# EAGLE board Temp Sensor w_ button, LCD &amp;amp; LED (EAGLE 9.7.0)

Size 167.13 x 146.74 mm. Coordinates in mm from the lower left corner, seen from the top.
Outline: 0,0 167.13,0 167.13,146.74 0,146.74 0,0
Copper layers (1*16): Top 0.035mm / dielectric 1.5mm / Bottom 0.035mm
Design rules "default": minimum track width 6mil, minimum drill 0.35mm, track to track 6mil, track to pad 6mil, pad to pad 6mil, via to via 6mil, smd to smd 6mil, copper to edge 40mil, drill to drill 6mil, minimum pad ring 10mil, minimum via ring 8mil, stop-mask expansion 4mil, vias tented up to drill 0mil, thermal gap 10mil

## Footprints (pad centres in the part's own frame; a part is rotated, then mirrored left to right if it is on the bottom)
LEDRD254W60D565H860B = drill 0.981 pad 1.581: 1 -1.27,0; 2 1.27,0
LEDRD254W60D565H860B_Y = drill 0.981 pad 1.581: 1 -1.27,0; 2 1.27,0
LEDRD254W60D565H860B_G = drill 0.981 pad 1.581: 1 -1.27,0; 2 1.27,0
LEDRD254W60D565H860B_B = drill 0.981 pad 1.581: 1 -1.27,0; 2 1.27,0
LED-RGB-5MM = drill 0.9: B 0.635,0.635; C -0.635,-0.635; G 1.905,-0.635; R -1.905,0.635
RESAD1016W63L850D250B = drill 0.83 pad 1.43: 1 -5.08,0; 2 5.08,0
HA-06-SM065 = drill 1 pad 1.676: 1 -2.54,-2.54; 2 0,2.54; 3 2.54,-2.54
SWITCH-MOMENTARY-PTH-6.5MM = drill 1.016 pad 1.88: 1 -3.251,2.261; 2 3.251,2.261; 3 -3.251,-2.261; 4 3.251,-2.261
ARDUINO-UNO-R3-SHIELD = drill 1.016 pad 1.88: 3.3V 24.13,-2.54; 5V 24.13,0; A0 24.13,12.7; A1 24.13,15.24; A2 24.13,17.78; A3 24.13,20.32; A4 24.13,22.86; A5 24.13,25.4; AREF -24.13,-13.97; D2 -24.13,20.32; D3 -24.13,17.78; D4 -24.13,15.24; D5 -24.13,12.7; D6 -24.13,10.16; D7 -24.13,7.62; D8 -24.13,3.81; D9 -24.13,1.27; D10 -24.13,-1.27; D11 -24.13,-3.81; D12 -24.13,-6.35; D13 -24.13,-8.89; GND@0 24.13,2.54; GND@1 24.13,5.08; GND@2 -24.13,-11.43; IOREF 24.13,-7.62; NC 24.13,-10.16; RES 24.13,-5.08; RX -24.13,25.4; SCL -24.13,-19.05; SDA -24.13,-16.51; TX -24.13,22.86; VIN 24.13,7.62
TO92 = drill 0.813 octagon: 1 -1.27,0; 2 0,1.905; 3 1.27,0
JHD-162A = drill 1.016 long: 1 -19.05,0; 2 -16.51,0; 3 -13.97,0; 4 -11.43,0; 5 -8.89,0; 6 -6.35,0; 7 -3.81,0; 8 -1.27,0; 9 1.27,0; 10 3.81,0; 11 6.35,0; 12 8.89,0; 13 11.43,0; 14 13.97,0; 15 16.51,0; 16 19.05,0

## Placement (x,y rotation side)
D1  RED  [LEDRD254W60D565H860B]  156.51,39.38 0 top
D2  YELLOW  [LEDRD254W60D565H860B_Y]  148.89,39.38 0 top
D3  GREEN  [LEDRD254W60D565H860B_G]  141.27,39.38 0 top
D4  BLUE  [LEDRD254W60D565H860B_B]  133.65,39.38 0 top
D5  BLUE  [LEDRD254W60D565H860B_B]  133.65,36.84 0 top
D6  GREEN  [LEDRD254W60D565H860B_G]  141.27,36.84 0 top
D7  YELLOW  [LEDRD254W60D565H860B_Y]  148.89,36.84 0 top
D8  RED  [LEDRD254W60D565H860B]  156.51,36.84 0 top
D9  LED-RGBRCBG-PTH  [LED-RGB-5MM]  143.81,19.06 180 top
R1  1k  [RESAD1016W63L850D250B]  96.82,13.98 90 top
R2  200  [RESAD1016W63L850D250B]  142.54,49.54 90 top
R3  200  [RESAD1016W63L850D250B]  150.16,49.54 90 top
R4  200  [RESAD1016W63L850D250B]  157.78,49.54 90 top
R5  200  [RESAD1016W63L850D250B]  134.92,49.54 90 top
R6  220  [RESAD1016W63L850D250B]  128.02,120.13 90 top
R7  200  [RESAD1016W63L850D250B]  132.38,29.22 90 top
R8  200  [RESAD1016W63L850D250B]  140,29.22 90 top
R9  200  [RESAD1016W63L850D250B]  155.24,29.22 90 top
RPOT1  10k  [HA-06-SM065]  97.89,139.69 0 top
S1  SWITCH_MOMENTARY  [SWITCH-MOMENTARY-PTH-6.5MM]  94.28,30.49 90 top
U1  ARDUINO-UNO-R3-SHIELD  [ARDUINO-UNO-R3-SHIELD]  47.88,29.84 270 top
U2  TMP36GT9Z_TO92  [TO92]  104.44,26.68 0 top
U3  LCD-16X2JHD-162A  [JHD-162A]  111.51,115.17 0 top

## Library data of the parts
D1 D8 = Tinkercad; CATEGORY: Opto-Electronic; SUB-CATEGORY: LED; VALUE: LED_RED
D2 D7 = Tinkercad; CATEGORY: Opto-Electronic; SUB-CATEGORY: LED; VALUE: LED_YELLOW
D3 D6 = Tinkercad; CATEGORY: Opto-Electronic; SUB-CATEGORY: LED; VALUE: LED_GREEN
D4 D5 = Tinkercad; CATEGORY: Opto-Electronic; SUB-CATEGORY: LED; VALUE: LED_BLUE
D9 R1-R9 RPOT1 S1 U1-U3 = Tinkercad

## Nets
D1_C: D1.2 D8.2 R4.1
D2_C: D2.2 D7.2 R3.1
D3_C: D3.2 D6.2 R2.1
D4_C: D4.2 D5.2 R5.1
D9_B: D9.B R7.1
D9_G: D9.G R8.1
D9_R: D9.R R9.1
U1_5V: R6.2 RPOT1.3 S1.1 S1.2 U1.5V U2.3 U3.2
U1_A0: U1.A0 U2.2
U1_D2: R1.2 S1.3 S1.4 U1.D2
U1_D3: U1.D3 U3.14
U1_D4: U1.D4 U3.13
U1_D5: U1.D5 U3.12
U1_D6: U1.D6 U3.11
U1_D7: U1.D7 U3.4
U1_D8: U1.D8 U3.6
U1_D10: D4.1 D5.1 R7.2 U1.D10
U1_D11: D3.1 D6.1 R8.2 U1.D11
U1_D12: D2.1 D7.1 U1.D12
U1_D13: D1.1 D8.1 R9.2 U1.D13
U1_GND: D9.C R1.1 R2.2 R3.2 R4.2 R5.2 RPOT1.1 U1.GND@0 U1.GND@1 U1.GND@2 U2.1 U3.1 U3.5 U3.16
U3_LED+: R6.1 U3.15
U3_VO: RPOT1.2 U3.3

## Tracks (layer width: path | path; a pad name or v marks a point on that pad's centre or on a via)
D1_C  (2 unrouted)
D2_C  (2 unrouted)
D3_C  (2 unrouted)
D4_C  (2 unrouted)
D9_B  (1 unrouted)
D9_G  (1 unrouted)
D9_R  (1 unrouted)
U1_5V  (6 unrouted)
U1_A0  (1 unrouted)
U1_D2  (3 unrouted)
U1_D3  (1 unrouted)
U1_D4  (1 unrouted)
U1_D5  (1 unrouted)
U1_D6  (1 unrouted)
U1_D7  (1 unrouted)
U1_D8  (1 unrouted)
U1_D10  (3 unrouted)
U1_D11  (3 unrouted)
U1_D12  (2 unrouted)
U1_D13  (3 unrouted)
U1_GND  (13 unrouted)
U3_LED+  (1 unrouted)
U3_VO  (1 unrouted)